# Altium PCB dieukhien.PcbDoc (part 2 of 3)
Units mil, origin at the board's own origin, x right, y up, seen from the top; angles counter-clockwise.
Board outline 7680 x 3350 mil, 2 copper layers (Top Layer, Bottom Layer); 551 components, 172 nets, 1771 pads, 0 vias.
Unrouted connection lines stored in the file: 181.
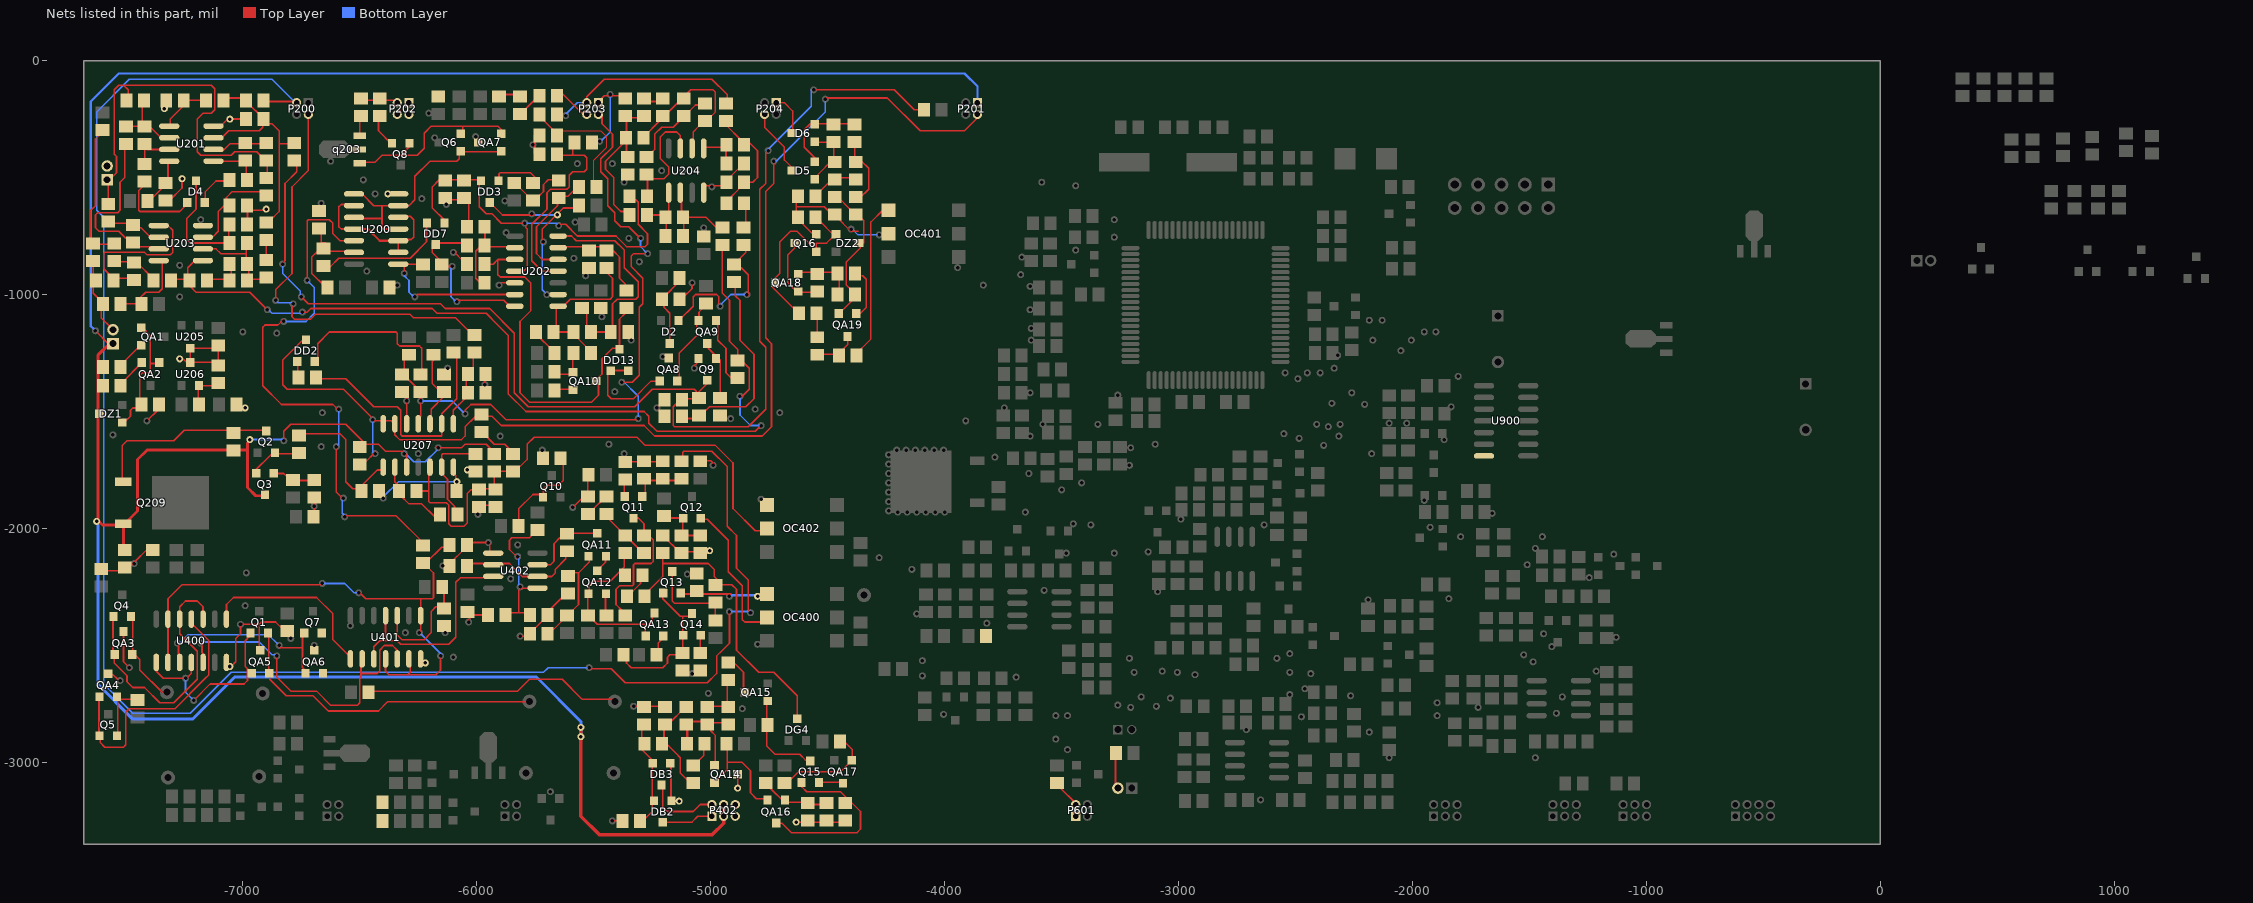
[diagram p2: the nets of this part, all layers, seen from the top]

## Nets (pads, with @x,y where several pads share a name; then routed paths per layer and width w, separated by ;. In a path a pad name is that pad's centre, name@x,y a point inside that pad or via, vN(x,y) a via of type N, cw(c..) or ccw(c..) an arc to the next point about the centre after c; other vN are vias at no path point)
1: C5.1 R15.1 R16.1 R17.2 U203.2 | length 373.3
  Top Layer w7: U203.2@-7135,-805 -7115,-805 -7095,-825 -6985,-825 ; R16.1@-6985,-850 R15.1@-6985,-775 ; R16.1@-6975,-880 -6975,-935 R17.2@-6890,-935
15V: C20.2 C230.1 DZ1.3 P201.1 P402.3 P402.4 pad.0@-5555,-2850 pad.0@-5555,-2890 pad.0@-6970,-1620 pad.0@-7625,-1970 Q3.3 Q209.3 R23.2 R24.2 R28.1 R32.2 R39.2 U207.3 | length 12513.8
  Top Layer w7: -7635,-1155 -7630,-1155 C230.1@-7575,-1210 ; C230.1@-7570,-1215 C230.1@-7560,-1215 ; C230.1@-7570,-1210 C230.1@-7555,-1210 ; -6825,-1615 -6825,-1585 -6795,-1555 -6560,-1555 -6475,-1640 -6435,-1640 -6420,-1640 -6390,-1670 -6315,-1670 -6300,-1685 U207.3@-6300,-1710 ; -6175,-1650 -6170,-1655 -6065,-1655 -6050,-1640 -5960,-1640 R39.2@-5930,-1670
  Top Layer w12: pad.0@-6965,-1620 -6980,-1635 -6980,-1825 -6945,-1860 Q3.3@-6920,-1860
  Top Layer w13: C230.1@-7570,-1210 -7620,-1260 -7620,-1965 -7600,-1985 -7510,-1985 -7450,-1925 -7450,-1705 -7410,-1665 -6985,-1665 ; C20.2@-7510,-2095 Q209.3@-7510,-1980
  Top Layer w15: pad.0@-5555,-2850 -5555,-3230 -5475,-3310 -4995,-3310 -4945,-3260 P402.4@-4945,-3180
  Bottom Layer w7: -6312.5,-1672.5 -6270,-1715 -6220,-1715 -6170,-1665
  Bottom Layer w7.87: pad.0@-6975,-1620 -6825,-1620
  Bottom Layer w10: -7625,-1160 -7650,-1135 -7650,-175 -7530,-55 -3915,-55 -3860,-110 P201.1@-3860,-190
  Bottom Layer w13: pad.0@-7620,-1975 -7620,-2665 -7470,-2815 -7215,-2815 -7035,-2635 -5745,-2635 -5555,-2825 -5555,-2875
380V1: P200.3 R4.2 R126.2 | length 7616.9
  Top Layer w7: R4.2@-6895,-175 P200.3@-6765,-175 ; -5520,-2600 -5425,-2600 -5365,-2660 -5015,-2660 -4975,-2620 -4975,-2545 -4950,-2520 -4920,-2490 -4920,-2360 ; R126.2@-5120,-1705 -5120,-1675 -5115,-1670 -4995,-1670 -4930,-1735 -4930,-1990 -4890,-2030 -4890,-2170 -4840,-2220 -4840,-2350 -4835,-2355
  Bottom Layer w7: P200.3@-6775,-180 -6875,-80 -7485,-80 -7625,-220 -7625,-640 -7595,-670 -7595,-2665 -7470,-2790 -7225,-2790 -7050,-2615 -5715,-2615 -5695,-2595 -5520,-2595
  Bottom Layer w10: -4925,-2355 -4830,-2355
380V2: P200.2 R47.2 | length 1791.2
  Top Layer w7: -6860,-1025 -6860,-980 -6790,-910 -6790,-540 -6720,-470 P200.2@-6720,-230 ; -6790,-1050 -6790,-1095 -6780,-1105 -6710,-1105 -6690,-1085 -6285,-1085 -6270,-1100 -6090,-1100 R47.2@-6022.5,-1167.5
  Bottom Layer w7: -6860,-1025 -6850,-1035 -6785,-1035
G_15VTD: C16.2 DD2.3 P201.2 R32.1 U207.13 U207.14 | length 4974.1
  Top Layer w7: DD2.3@-6740,-1190 -6830,-1280 -6830,-1385 -6810,-1405 -6570,-1405 -6450,-1525 ; R32.1@-6480,-1730 -6480,-1720 -6432.5,-1672.5 ; -6440,-1540 -6365,-1540 U207.13@-6350,-1555 ; U207.13@-6350,-1565 -6350,-1600 -6330,-1620 -6065,-1620 -6050,-1605 -6050,-1565 C16.2@-6005,-1520 ; C16.2@-5985,-1520 -5935,-1520 -5895,-1560 -5330,-1560 -5285,-1560 -5240,-1605 -4780,-1605 -4740,-1565 -4740,-1525 -4740,-1210 -4765,-1185 -4765,-560 -4730,-525 -4730,-435 ; -4505,-160 -4245,-160 -4105,-300 -3915,-300 -3865,-250 P201.2@-3865,-240
  Bottom Layer w7: -6445,-1675 -6445,-1535 ; -4725,-430 -4720,-430 -4510,-220 -4510,-165
GND: C98.1 C118.1 C119.2 C636.2 P601.1 P601.2 pad.0@-6220,-2575 pad.0@-6380,-570 pad.0@-7055,-2590 U401.7 U900.7 | length 346.1
  Top Layer w7: C118.1@-3515,-3105 C118.1@-3515,-3085 ; C118.1@-3510,-3085 -3510,-3105 P601.2@-3440,-3175 ; C636.2@-3270,-3110 C119.2@-3270,-2950
  Bottom Layer w6.5: P601.1@-3445,-3220 P601.2@-3445,-3180
  Bottom Layer w10: P601.1@-3440,-3230 P601.1@-3435,-3225
I_FPC: P203.3 R72.2 R94.2 | length 808.7
  Top Layer w7: P203.3@-5530,-175 -5530,-155 -5455,-80 -4995,-80 -4930,-145 R94.2@-4930,-165
  Bottom Layer w7: -5620,-230 -5570,-180 P203.3@-5530,-180
N: C2.1 C3.2 C5.2 C6.2 C7.1 C8.1 C10.2 C11.1 C12.1 C13.1 C14.1 C15.1 C17.1 C18.1 C19.2 C20.1 C21.2 C23.1 C27.1 C28.2 C29.1 C30.1 C31.2 C32.2 C33.2 C34.1 C35.1 C36.1 C37.1 C38.2 C40.1 C43.1 C46.1 C47.2 C48.2 C49.1 C50.2 C51.1 C53.1 C54.2 C55.1 C56.2 C57.2 C59.2 C60.1 C61.1 C62.2 C63.2 C65.1 C133.1 C230.2 C236.2 DB2.1 DB3.1 OC402.4 P202.1 P202.2 P203.1 P402.5 P402.6 pad.0@-4635,-3255 pad.0@-4885,-3110 pad.0@-5005,-2095 pad.0@-5135,-3165 pad.0@-6040,-1750 pad.0@-6900,-635 pad.0@-6990,-1485 pad.0@-7055,-250 pad.0@-7260,-505 pad.0@-7270,-1275 pad.0@-7335,-205 Q9.2 q203.2 QA3.3 QA4.3 QA5.3 QA6.3 QA7.3 QA8.3 QA14.3 R2.1 R16.2 R22.1 R26.1 R27.2 R31.1 R37.1 R38.1 R41.2 R42.2 R73.1 R83.2 R85.2 R90.1 R105.1 R112.2 R114.1 R118.1 R119.2 R122.2 R124.2 R125.2 R128.1 R131.2 R136.1 R137.2 R140.2 R155.1 R156.1 R280.2 U200.7 U201.4 U202.12 U203.4 U204.4 U205.3 U206.3 U207.12 U400.7 U402.1 | length 5447.5
  Top Layer w7: R22.1@-7640,-860 -7640,-995 -7605,-1030 -7605,-1100 C230.2@-7565,-1140 ; C21.2@-7590,-2180 -7500,-2180 -7460,-2140 -7410,-2090 C19.2@-7385,-2090 ; QA4.3@-7565,-2625 -7555,-2625 -7535,-2645 ; QA3.3@-7510,-2440 -7510,-2570 -7480,-2600 ; -7410,-1540 -7360,-1490 R26.1@-7345,-1490 ; C2.1@-7310,-600 -7310,-595 -7260,-545 -7260,-510 pad.0@-7255,-505 ; pad.0@-7270,-1270 -7260,-1270 U206.3@-7235,-1295 ; U206.3@-7225,-1280 U205.3@-7225,-1235 ; U205.3@-7220,-1230 -7100,-1230 -7105,-1235 R27.2@-7105,-1295 ; U206.3@-7215,-1290 -7115,-1290 R27.2@-7110,-1295 ; C6.2@-7140,-935 C5.2@-7065,-935 ; U201.4@-7100,-280 -7095,-280 -7065,-250 C3.2@-7005,-250 ; -7050,-2590 -7030,-2570 -7030,-2470 -7010,-2450 -7010,-2420 ; C5.2@-7050,-920 R16.2@-7050,-865 ; -7005,-2410 -6930,-2410 ; C8.1@-6980,-705 C7.1@-6980,-615 ; C7.1@-6965,-640 pad.0@-6905,-640 ; QA5.3@-6925,-2510 -6930,-2505 -6930,-2410 ; C23.1@-6830,-2435 -6830,-2430 -6860,-2400 -6920,-2400 -6930,-2410 ; C12.1@-6695,-1945 R31.1@-6695,-1880 ; U207.12@-6300,-1525 C18.1@-6300,-1425 ; R90.1@-6135,-595 -6045,-595 -6035,-605 R85.2@-6035,-705 ; C28.2@-6115,-2145 -6110,-2145 C29.1@-6055,-2090 ; -6090,-815 -6090,-825 C38.2@-6065,-850 ; -6035,-2405 -6035,-2390 -6015,-2370 C31.2@-5960,-2370 ; C29.1@-6035,-2060 -5950,-2060 -5945,-2065 U402.1@-5945,-2100 ; R38.1@-5990,-1900 -5910,-1900 C13.1@-5905,-1905 ; C17.1@-5970,-1425 -5965,-1420 R41.2@-5965,-1350 ; -5895,-950 U202.12@-5855,-950 ; -5820,-2460 R119.2@-5795,-2460 ; R119.2@-5755,-2430 R118.1@-5710,-2385 ; C36.1@-5755,-395 C35.1@-5755,-320 ; R118.1@-5690,-2350 -5630,-2290 C53.1@-5630,-2270 ; C53.1@-5615,-2275 C53.1@-5610,-2275 ; -5595,-1910 -5590,-1910 -5525,-1845 C54.2@-5525,-1780 ; R122.2@-5550,-1865 R122.2@-5530,-1865 ; P203.1@-5480,-180 -5480,-175 -5455,-150 R83.2@-5370,-150 ; -5425,-3245 -5420,-3250 R280.2@-5390,-3250 ; R124.2@-5355,-1715 -5215,-1715 R125.2@-5210,-1720 ; -5340,-2760 -5315,-2760 ; R137.2@-5270,-2765 -5265,-2760 C62.2@-5190,-2760 ; C59.2@-5200,-2050 -5185,-2050 R128.1@-5150,-2085 ; DB2.1@-5170,-3160 DB3.1@-5170,-3005 ; DB2.1@-5160,-3165 pad.0@-5130,-3165 ; R128.1@-5120,-2100 -5040,-2100 -5035,-2095 pad.0@-4995,-2095 ; C49.1@-5120,-1010 -5115,-1010 -5080,-975 -5080,-945 ; -5095,-2195 R131.2@-5045,-2195 ; -5070,-1315 -5070,-1305 -5060,-1295 Q9.2@-5060,-1280 ; C57.2@-5035,-1710 -5000,-1710 -4985,-1725 ; U204.4@-5035,-545 -5025,-535 C47.2@-4950,-535 ; R140.2@-5005,-2760 C63.2@-4950,-2760 ; C63.2@-4930,-2755 C61.1@-4930,-2650 ; C47.2@-4920,-500 C46.1@-4860,-440 ; pad.0@-4885,-3105 QA14.3@-4885,-3050 ; pad.0@-4635,-3260 -4630,-3255 R156.1@-4425,-3255
  Bottom Layer w7: -5470,-345 -5430,-305 -5430,-145
NetC1_1: C1.1 R1.2 R5.2 U201.6 | length 222.8
  Top Layer w7: R5.2@-7495,-280 -7440,-280 -7430,-270 R1.2@-7430,-185 ; C1.1@-7395,-280 -7395,-285 U201.6@-7350,-330
NetC1_2: C1.2 R7.1 U201.7 | length 149.1
  Top Layer w7: R7.1@-7425,-440 -7420,-435 C1.2@-7420,-370 ; C1.2@-7410,-380 -7340,-380 U201.7@-7335,-375
NetC4_1: C4.1 R14.1 U201.1 | length 174.1
  Top Layer w7: U201.1@-7110,-430 -7005,-430 C4.1@-6995,-440 ; R14.1@-6985,-500 C4.1@-6985,-445
NetC4_2: C4.2 R11.2 U201.2 | length 202.4
  Top Layer w7: U201.2@-7095,-385 -7085,-385 -7055,-355 R11.2@-6905,-355
NetC8_2: C8.2 D4.3 R15.2 | length 529.9
  Top Layer w7: D4.3@-7195,-515 -7200,-520 -7200,-635 -7240,-675 -7240,-765 -7225,-780 R15.2@-7075,-780 ; R15.2@-7060,-780 C8.2@-7060,-690
NetC9_1: C9.1 R17.1 | length 75
  Top Layer w7: R17.1@-6900,-845 C9.1@-6900,-770
NetC11_2: C11.2 R19.2 U203.5 | length 610.2
  Top Layer w7: C11.2@-7555,-930 -7595,-890 -7595,-825 -7590,-820 -7420,-820 -7410,-830 -7310,-830 -7300,-820 -7300,-725 U203.5@-7320,-705 ; C11.2@-7535,-930 R19.2@-7475,-930
NetC16_1: C16.1 R40.2 | length 178.1
  Top Layer w7: C16.1@-5990,-1595 -5970,-1595 -5925,-1640 -5880,-1640 R40.2@-5845,-1675
NetC17_2: C17.2 R41.1 R47.1 U207.8 | length 300.2
  Top Layer w7: U207.8@-6100,-1535 -6100,-1495 -6045,-1440 -6045,-1350 -6015,-1320 R47.1@-6015,-1270
NetC22_2: C22.2 Q5.2 QA4.2 | length 227.1
  Top Layer w7: QA4.2@-7535,-2720 -7535,-2870 Q5.2@-7530,-2875 ; QA4.2@-7530,-2730 C22.2@-7460,-2730
NetC24_1: C24.1 Q7.2 QA6.2 | length 1090.9
  Top Layer w7: C24.1@-6455,-2695 -5825,-2695 -5775,-2645 -5635,-2645 -5550,-2730 -5420,-2730
NetC28_1: C28.1 R116.1 U402.2 U402.6 | length 382.6
  Top Layer w7: C28.1@-6030,-2150 U402.2@-5945,-2150 ; U402.2@-5895,-2150 -5860,-2150 -5805,-2205 U402.6@-5770,-2205 ; U402.6@-5710,-2205 -5680,-2205 -5665,-2190 -5665,-2175 -5620,-2130 R116.1@-5620,-2110
NetC30_2: C30.2 R61.2 U401.10 | length 444
  Top Layer w7: U401.10@-6340,-2395 -6340,-2455 -6320,-2475 -6225,-2475 -6195,-2445 -6195,-2355 -6175,-2335 C30.2@-6150,-2335 ; C30.2@-6140,-2335 R61.2@-6140,-2260
NetC31_1: C31.1 R115.1 R118.2 U402.5 | length 628.1
  Top Layer w7: C31.1@-5875,-2360 R118.2@-5770,-2360 ; -5830,-2125 -5830,-2120 -5860,-2090 -5860,-2050 -5850,-2040 -5775,-2040 -5750,-2015 R115.1@-5735,-2015 ; -5820,-2360 -5820,-2265 -5810,-2255 ; -5810,-2260 -5805,-2255 U402.5@-5750,-2255
  Bottom Layer w7: -5820,-2240 -5820,-2115
NetC32_1: C32.1 R66.2 R278.2 U200.13 | length 394.6
  Top Layer w7: C32.1@-6665,-725 -6665,-780 R66.2@-6645,-780 ; R278.2@-6652.5,-962.5 -6705,-910 -6705,-850 -6705,-840 -6680,-815 U200.13@-6540,-815
NetC34_2: C34.2 R80.2 R82.2 U202.6 | length 367.8
  Top Layer w7: U202.6@-5640,-800 -5635,-795 R80.2@-5455,-795 ; R80.2@-5425,-815 -5415,-815 -5390,-840 -5390,-930 -5365,-955 R82.2@-5365,-965
NetC35_2: C35.2 R72.1 R77.1 | length 544.2
  Top Layer w4: C35.2@-5635,-300 -5470,-300 -5445,-325 -5445,-370 -5500,-425 R77.1@-5500,-515
  Top Layer w7: R72.1@-5730,-225 -5730,-240 C35.2@-5655,-315
  Top Layer w10: C35.2@-5655,-310 C35.2@-5645,-310
NetC36_2: C36.2 R73.2 U202.4 | length 877.5
  Top Layer w7: U202.4@-5680,-900 -5720,-900 -5765,-855 -5765,-700 -5700,-635 -5700,-565 -5685,-550 -5615,-550 -5605,-540 -5605,-490 -5590,-475 -5540,-475 -5530,-465 -5530,-415 -5540,-405 -5595,-405 ; C36.2@-5645,-405 -5595,-405 ; R73.2@-5590,-360 -5590,-400 -5595,-405
NetC39_1: C39.1 C43.2 R83.1 R84.2 R96.2 | length 569.2
  Top Layer w7: R96.2@-5370,-645 -5385,-645 -5415,-615 -5415,-500 -5450,-465 -5450,-430 -5370,-350 R84.2@-5370,-335 ; R84.2@-5365,-330 -5360,-325 R83.1@-5360,-235 ; C43.2@-5360,-400 R84.2@-5360,-350 ; R83.1@-5340,-245 -5310,-245 C39.1@-5305,-240
NetC39_2: C39.2 R92.2 | length 57.1
  Top Layer w7: C39.2@-5280,-175 -5230,-175 R92.2@-5225,-170
NetC41_1: C41.1 R84.1 R92.1 R93.2 U204.6 | length 602.7
  Top Layer w7: R84.1@-5295,-335 -5205,-245 R93.2@-5130,-170 ; R93.2@-5115,-160 -5115,-155 -5085,-125 -4990,-125 -4980,-135 -4980,-220 -5010,-250 C41.1@-5010,-255 ; U204.6@-5075,-350 -5075,-305 C41.1@-5050,-280
NetC41_2: C41.2 C42.2 R93.1 | length 330.9
  Top Layer w7: C42.2@-5250,-390 -5240,-380 -5240,-315 -5210,-285 -5160,-285 -5065,-190 C41.2@-5040,-190
NetC42_1: C42.1 R95.1 U204.7 | length 472.3
  Top Layer w7: R95.1@-5270,-580 C42.1@-5270,-495 ; C42.1@-5255,-505 -5200,-505 -5180,-485 -5180,-455 -5215,-420 -5215,-325 -5195,-305 -5145,-305 -5130,-320 U204.7@-5130,-350
NetC44_1: C44.1 R98.1 R107.2 U204.2 | length 318.1
  Top Layer w7: U204.2@-5125,-600 -5125,-640 C44.1@-5105,-660 ; R98.1@-5115,-755 C44.1@-5115,-690 ; C44.1@-5110,-685 -5095,-670 -5020,-670 -4975,-715 R107.2@-4950,-715
NetC44_2: C44.2 R96.1 R98.2 U204.1 | length 175
  Top Layer w7: R96.1@-5270,-660 C44.2@-5205,-660 ; R98.2@-5190,-755 C44.2@-5190,-695 ; C44.2@-5180,-650 U204.1@-5180,-600
NetC45_1: C45.1 R80.1 R100.1 R101.2 U202.1 | length 660.1
  Top Layer w7: R100.1@-5660,-1155 U202.1@-5660,-1045 ; R100.1@-5655,-1160 R101.2@-5585,-1160 ; U202.1@-5630,-1050 -5600,-1020 -5430,-1020 -5420,-1010 -5420,-930 -5457.5,-892.5 -5465,-900 R80.1@-5460,-900 ; R101.2@-5590,-1175 -5580,-1175 -5520,-1235 C45.1@-5510,-1235
NetC45_2: C45.2 QA10.1 R103.1 | length 149.1
  Top Layer w7: R103.1@-5660,-1340 -5600,-1340 -5590,-1330 C45.2@-5590,-1255
NetC46_2: C46.2 R97.2 U204.5 | length 150
  Top Layer w7: U204.5@-5025,-370 -4935,-370 C46.2@-4935,-430
NetC47_1: C47.1 R94.1 R97.1 R106.2 | length 454.6
  Top Layer w7: R94.1@-4935,-255 -4935,-275 -4870,-340 -4845,-340 -4800,-385 -4800,-500 -4820,-520 C47.1@-4845,-520 ; R106.2@-4925,-595 -4875,-545 C47.1@-4860,-545
NetC49_2: C49.2 D2.3 R110.1 | length 278.1
  Top Layer w7: C49.2@-5200,-1035 -5200,-1055 -5175,-1080 D2.3@-5175,-1205 ; C49.2@-5195,-1005 -5140,-950 R110.1@-5120,-950
NetC50_1: C50.1 R109.1 R113.1 | length 888.3
  Top Layer w7: C50.1@-5115,-1530 -5055,-1530 -5005,-1480 -4850,-1480 -4815,-1445 -4815,-1255 -4875,-1195 -4875,-1025 -4895,-1005 -4895,-955 R109.1@-4925,-955
NetC51_2: C51.2 Q10.1 R63.1 | length 419.4
  Top Layer w7: R63.1@-5820,-2005 -5820,-1915 -5760,-1855 Q10.1@-5725,-1855 ; Q10.1@-5715,-1860 -5715,-1830 -5700,-1815 -5650,-1815 -5630,-1795 C51.2@-5630,-1715
NetC52_2: C52.2 QA12.1 QA13.1 QA13.3 R123.1 R127.1 R130.2 | length 673.5
  Top Layer w7: C52.2@-5525,-2365 QA12.1@-5525,-2285 ; QA12.1@-5520,-2280 -5520,-2245 -5500,-2225 -5430,-2225 -5370,-2165 R127.1@-5370,-2120 ; C52.2@-5500,-2395 -5485,-2410 -5260,-2410 -5250,-2400 QA13.3@-5250,-2365 ; QA13.1@-5280,-2445 -5280,-2410
NetC53_2: C53.2 QA11.1 R117.2 R119.1 | length 433.3
  Top Layer w7: R119.1@-5695,-2445 -5685,-2445 -5565,-2325 -5565,-2190 ; C53.2@-5595,-2190 -5565,-2190 ; QA11.1@-5520,-2120 -5520,-2145 -5565,-2190
NetC55_2: C55.2 Q12.1 R128.2 R279.1 | length 238.3
  Top Layer w7: R279.1@-5185,-1955 -5110,-1955 -5120,-1965 -5120,-2040 -5110,-2030 C55.2@-5050,-2030
NetC56_1: C56.1 Q11.1 R125.1 R126.1 | length 185
  Top Layer w7: Q11.1@-5280,-1855 C56.1@-5280,-1800 ; C56.1@-5280,-1795 R126.1@-5150,-1795
NetC58_1: C58.1 R127.2 | length 193.8
  Top Layer w7: -5440,-1945 -5440,-1955 C58.1@-5310,-2085
NetC58_2: C58.2 Q11.3 R121.2 | length 586.8
  Top Layer w7: R121.2@-5380,-2350 -5405,-2325 -5405,-2260 -5390,-2245 -5335,-2245 -5330,-2240 -5330,-2155 -5325,-2150 -5255,-2150 -5245,-2140 -5245,-2050 -5285,-2010 -5285,-1980 -5310,-1955 Q11.3@-5325,-1955
NetC59_1: C59.1 DG4.3 R129.1 R132.2 | length 1273.8
  Top Layer w7: R129.1@-5270,-2275 -5270,-2270 -5205,-2205 C59.1@-5205,-2110 ; -5205,-2150 -5010,-2150 -4985,-2175 -4985,-2205 R132.2@-4955,-2235 ; R132.2@-4965,-2240 -4910,-2240 -4890,-2260 -4890,-2520 -4795,-2615 -4730,-2615 -4630,-2715 DG4.3@-4630,-2810
NetC60_2: C60.2 Q13.1 Q14.1 Q14.3 R134.1 | length 591.8
  Top Layer w7: R134.1@-5360,-2565 -5360,-2575 -5340,-2595 -5205,-2595 -5185,-2575 -5185,-2550 -5175,-2540 C60.2@-5140,-2540 ; Q13.1@-5205,-2270 -5205,-2300 -5130,-2375 Q14.3@-5085,-2375 ; C60.2@-5120,-2520 Q14.1@-5120,-2465 ; Q14.1@-5120,-2455 -5120,-2375
NetC61_2: C61.2 QA15.3 | length 168.6
  Top Layer w7: C61.2@-4920,-2570 -4905,-2570 -4860,-2615 QA15.3@-4860,-2705
NetC62_1: C62.1 C64.1 R138.1 R139.2 | length 395.4
  Top Layer w7: C62.1@-5200,-2845 -5200,-2910 -5150,-2960 -5130,-2980 -5130,-3045 C64.1@-5100,-3075 ; C62.1@-5180,-2845 -5180,-2835 -5110,-2765 R139.2@-5110,-2750
NetC63_1: C63.1 QA14.1 R139.1 R140.1 R141.2 | length 373.3
  Top Layer w7: R139.1@-5090,-2825 R140.1@-5015,-2825 ; R140.1@-5000,-2850 -5000,-2865 -4980,-2885 QA14.1@-4980,-3010 ; R140.1@-4990,-2830 C63.1@-4920,-2830
  Top Layer w10: R141.2@-5100,-2910 R139.1@-5100,-2850
NetC64_2: C64.2 R141.1 | length 97.4
  Top Layer w7: C64.2@-5060,-3000 -5030,-2970 R141.1@-5030,-2915
NetC65_2: C65.2 QA16.1 R144.1 R155.2 | length 254.9
  Top Layer w7: R144.1@-4745,-3110 -4685,-3170 C65.2@-4595,-3170 ; C65.2@-4590,-3180 R155.2@-4510,-3180
NetC66_1: C66.1 QA17.1 R145.1 | length 392.6
  Top Layer w7: R145.1@-4665,-3075 -4660,-3075 -4625,-3040 -4445,-3040 -4395,-2990 -4395,-2945 C66.1@-4425,-2915
NetC67_1: C67.1 D5.1 D6.1 R150.2 | length 251.1
  Top Layer w6.5: D5.1@-4550,-495 -4475,-420 -4475,-350 D6.1@-4550,-350
NetC67_2: C67.2 D5.2 D6.2 R151.2 | length 359
  Top Layer w6.5: -4575,-270 -4600,-295 -4600,-370 -4555,-415 D5.2@-4555,-430 ; D6.2@-4555,-270 R151.2@-4385,-270
NetC68_1: C68.1 R146.1 R150.1 | length 185.7
  Top Layer w6.5: R146.1@-4545,-585 -4545,-570 -4495,-520 R150.1@-4490,-520 ; R150.1@-4470,-500 C68.1@-4375,-500
NetC68_2: C68.2 R149.2 R151.1 | length 289
  Top Layer w6.5: C68.2@-4385,-425 R151.1@-4385,-345 ; C68.2@-4375,-430 -4355,-430 -4325,-460 -4325,-550 R149.2@-4365,-590
NetC69_1: C69.1 OC401.2 Q16.2 R146.2 R147.2 | length 607.8
  Top Layer w6.5: R147.2@-4640,-660 -4635,-655 R146.2@-4635,-590 ; -4635,-625 -4515,-625 -4475,-665 -4465,-665 -4400,-730 -4370,-730 ; R147.2@-4625,-680 -4565,-740 Q16.2@-4550,-740
  Bottom Layer w6.5: -4400,-715 -4370,-745 -4285,-745
NetC69_2: C69.2 DZ2.3 QA19.2 R149.1 R153.1 | length 597.7
  Top Layer w6.5: C69.2@-4465,-575 -4395,-645 -4385,-645 -4345,-685 -4345,-780 ; QA19.2@-4440,-1070 -4375,-1005 R153.1@-4375,-1000 ; R153.1@-4395,-985 -4420,-960 -4420,-860 -4360,-800 DZ2.3@-4360,-780
NetC70_1: C70.1 OC401.1 | length 674.7
  Top Layer w6.5: C70.1@-4390,-1260 -4385,-1260 -4315,-1190 -4315,-690 OC401.1@-4265,-640
NetC70_2: C70.2 QA19.3 R158.1 | length 186.6
  Top Layer w6.5: R158.1@-4550,-1255 -4455,-1255 -4415,-1215 QA19.3@-4415,-1180
NetC236_1: C236.1 R1.1 R9.2 R11.1 R13.2 | length 1717.8
  Top Layer w7: C236.1@-7580,-515 -7575,-520 R9.2@-7575,-605 ; C236.1@-7580,-510 -7570,-510 -7540,-480 -7540,-410 -7550,-400 -7550,-125 -7530,-105 -7510,-105 ; R1.1@-7490,-155 -7490,-125 -7510,-105 ; R11.1@-6910,-440 -6910,-420 -6940,-390 -7035,-390 -7050,-405 -7180,-405 -7195,-390 -7195,-250 -7170,-225 -7135,-225 -7120,-210 -7120,-120 -7135,-105 -7510,-105 ; R13.2@-6895,-500 R11.1@-6895,-440
NetD2_1: D2.1 R108.1 R109.2 | length 693.2
  Top Layer w7: D2.1@-5130,-1115 -5130,-1105 -5075,-1050 -5075,-1010 -5065,-1000 -4975,-1000 -4965,-1010 -4965,-1040 ; R109.2@-4920,-890 -4850,-820 R108.1@-4850,-800 ; R109.2@-4900,-885 -4870,-885 -4840,-915 -4840,-1005
  Bottom Layer w7: -4965,-1050 -4915,-1000 -4850,-1000
NetD4_1: D4.1 R7.2 | length 346.9
  Top Layer w7: R7.2@-7415,-525 -7445,-555 -7445,-640 -7440,-645 -7270,-645 D4.1@-7240,-615
NetD4_2: D4.2 R14.2 | length 168.6
  Top Layer w7: D4.2@-7160,-605 -7160,-560 -7115,-515 R14.2@-7055,-515
NetD5_3: D5.3 P204.4 | length 272.6
  Top Layer w6.5: P204.4@-4770,-230 -4770,-285 -4755,-300 -4685,-370 -4685,-425 D5.3@-4655,-455
NetD6_3: D6.3 P204.1 | length 174.5
  Top Layer w6.5: P204.1@-4720,-180 -4685,-180 -4650,-215 D6.3@-4650,-305
NetDB2_2: DB2.2 DB3.2 R137.1 R138.2 R280.1 | length 417.3
  Top Layer w7: R137.1@-5295,-2845 -5295,-2945 DB3.2@-5245,-2995 ; R280.1@-5290,-3250 -5250,-3210 DB2.2@-5250,-3170 ; DB2.2@-5250,-3160 DB3.2@-5250,-3010
NetDD2_1: DD2.1 R48.2 | length 45
  Top Layer w7: R48.2@-6765,-1345 DD2.1@-6765,-1300
NetDD2_2: DD2.2 R43.2 | length 750.2
  Top Layer w7: R43.2@-6225,-1325 -6235,-1315 -6235,-1230 -6245,-1220 -6330,-1220 -6340,-1210 -6340,-1165 -6345,-1160 -6630,-1160 -6680,-1210 ; -6680,-1210 -6680,-1275 -6680,-1210
NetDD3_1: DD3.1 R75.2 | length 197.4
  Top Layer w7: DD3.1@-5905,-510 -5905,-485 -5900,-480 -5770,-480 R75.2@-5745,-505
NetDD3_3: DD3.3 pad.0@-5655,-660 R78.2 U202.2 | length 769.2
  Top Layer w7: DD3.3@-5940,-615 -5935,-615 -5890,-660 -5755,-660 ; -5720,-780 -5720,-720 -5630,-630 R78.2@-5570,-630
  Bottom Layer w7: -5750,-660 pad.0@-5655,-660 ; -5720,-785 -5720,-980 -5700,-1000
NetDD7_2: DD7.2 R66.1 | length 563.5
  Top Layer w7: R66.1@-6655,-880 -6625,-880 -6590,-845 -6285,-845 -6215,-775 DD7.2@-6215,-695
NetDD7_3: DD7.3 R86.2 R88.2 U202.14 | length 712.6
  Top Layer w7: DD7.3@-6190,-780 -6190,-820 -6130,-880 -6100,-880 ; DD7.3@-6180,-780 R86.2@-6040,-780 ; -6085,-1025 -5885,-1025 -5855,-1055 U202.14@-5845,-1055
  Bottom Layer w7: -6110,-880 -6110,-1010 -6085,-1035
NetDD13_1: DD13.1 DD13.2 QA8.1 | length 407.3
  Top Layer w7: DD13.1@-5440,-1335 -5440,-1430 -5425,-1445 -5330,-1445 -5255,-1370 QA8.1@-5225,-1370 ; DD13.1@-5425,-1325 DD13.2@-5365,-1325
NetDZ1_1: DZ1.1 QA1.1 QA2.1 R26.2 | length 513.1
  Top Layer w7: DZ1.1@-7500,-1540 -7480,-1520 -7480,-1495 -7470,-1485 R26.2@-7445,-1485 ; R26.2@-7440,-1465 -7440,-1345 -7430,-1335 -7400,-1335 -7395,-1330 -7395,-1180 ; QA1.1@-7430,-1140 -7395,-1175 -7395,-1185 ; -7395,-1295 QA2.1@-7355,-1295
NetDZ2_1: DZ2.1 Q16.1 QA18.3 R147.1 R157.2 | length 770.5
  Top Layer w6.5: R157.2@-4630,-1075 -4735,-970 -4735,-940 -4705,-910 -4705,-775 -4660,-730 -4630,-730 -4580,-780 -4505,-780 -4480,-755 DZ2.1@-4470,-755 ; Q16.1@-4550,-820 -4550,-780 ; R147.1@-4535,-680 -4535,-685 DZ2.1@-4475,-745
NetOC400_4: OC400.4 pad.0@-4800,-2290 Q13.2 R131.1 | length 305
  Top Layer w7: Q13.2@-5110,-2280 -4915,-2280
  Bottom Layer w10: -4920,-2285 pad.0@-4810,-2285
NetOC400_5: OC400.5 Q12.2 | length 617.5
  Top Layer w7: Q12.2@-5040,-1960 -5015,-1960 -4925,-2050 -4925,-2185 -4865,-2245 -4865,-2390 -4855,-2400 -4790,-2400 OC400.5@-4775,-2385
NetP202_3: P202.3 P202.4 R64.2 R65.2 | length 189.1
  Top Layer w7: R65.2@-6480,-170 -6355,-170 P202.3@-6345,-180 ; P202.4@-6330,-225 P202.3@-6330,-175
NetQ1_1: Q1.1 QA5.1 U400.1 U400.4 | length 775.8
  Top Layer w7: U400.1@-7370,-2605 -7370,-2610 -7340,-2640 -7240,-2640 -7220,-2620 U400.4@-7220,-2600 ; -7210,-2735 -7140,-2665 -6995,-2665 -6980,-2650 -6980,-2600 -6990,-2590 -6990,-2480 -6970,-2460 Q1.1@-6970,-2445
  Bottom Layer w7: -7245,-2645 -7245,-2700 -7215,-2730
NetQ1_2: Q1.2 QA5.2 | length 1357.5
  Top Layer w7: QA5.2@-6890,-2615 Q1.2@-6890,-2455 ; QA5.2@-6885,-2630 -6885,-2645 -6815,-2715 -6700,-2715 -6635,-2780 -6420,-2780 -6380,-2740 -5775,-2740
NetQ2_2: Q2.2 Q3.2 R30.1 | length 213.1
  Top Layer w7: Q3.2@-6955,-1760 Q2.2@-6875,-1680 ; Q2.2@-6860,-1680 R30.1@-6760,-1680
NetQ2_3: Q2.3 Q209.1 R28.2 | length 781.9
  Top Layer w7: Q209.1@-7515,-1790 -7515,-1645 -7495,-1625 -7295,-1625 -7250,-1580 Q2.3@-6905,-1580
NetQ3_1: Q3.1 R29.2 R31.2 | length 177.4
  Top Layer w7: Q3.1@-6870,-1765 -6825,-1765 -6795,-1795 R31.2@-6705,-1795
NetQ4_1: Q4.1 QA3.1 U400.10 U400.12 | length 1093.3
  Top Layer w7: QA3.1@-7550,-2555 -7550,-2575 -7495,-2630 -7495,-2655 -7470,-2680 -7420,-2680 -7355,-2745 -7295,-2745 -7195,-2645 -7195,-2525 -7270,-2450 U400.12@-7270,-2415 ; U400.12@-7270,-2360 -7270,-2335 -7245,-2310 -7195,-2310 -7170,-2335 U400.10@-7170,-2370
  Top Layer w7.87: QA3.1@-7555,-2530 Q4.1@-7555,-2380
NetQ4_2: Q4.2 QA3.2 | length 391.8
  Top Layer w7: Q4.2@-7470,-2380 -7470,-2530 -7440,-2560 -7440,-2605 -7345,-2700 -7325,-2700
NetQ5_1: Q5.1 QA4.1 U400.11 | length 1111.8
  Top Layer w7: QA4.1@-7620,-2710 QA4.1@-7610,-2720 ; Q5.1@-7615,-2875 QA4.1@-7615,-2725 ; Q5.1@-7610,-2900 -7610,-2915 -7590,-2935 -7510,-2935 -7500,-2925 -7500,-2785 -7485,-2770 -7415,-2770 -7290,-2770 -7165,-2645 -7145,-2625 -7145,-2480 -7215,-2410 U400.11@-7220,-2410
NetQ6_1: Q6.1 QA7.1 U200.4 U200.6 U200.8 U200.10 | length 978.3
  Top Layer w7: U200.10@-6505,-675 -6405,-675 ; U200.8@-6505,-570 -6490,-570 -6440,-620 U200.6@-6370,-620 ; -6405,-620 -6405,-710 -6395,-720 -6370,-720 U200.4@-6365,-715 ; U200.6@-6330,-620 -6290,-620 -6265,-595 -6265,-495 -6200,-430 -6085,-430 -6075,-420 Q6.1@-6075,-390 ; Q6.1@-6055,-390 QA7.1@-5895,-390
NetQ6_2: Q6.2 Q8.1 q203.1 QA7.2 | length 807.1
  Top Layer w7: q203.1@-6480,-435 -6435,-435 -6405,-405 -6325,-405 ; Q8.1@-6280,-360 -6325,-405 ; -6085,-280 -5910,-280 QA7.2@-5895,-295 ; Q6.2@-6060,-305 -6060,-280 -6195,-280 -6225,-310 -6225,-375 -6255,-405 -6325,-405
NetQ7_1: Q7.1 QA6.1 U400.3 | length 787.3
  Top Layer w7: -6850,-2500 -6840,-2510 -6745,-2510 ; Q7.1@-6745,-2460 -6745,-2595 -6740,-2600 QA6.1@-6740,-2630
  Top Layer w7.87: U400.3@-7275,-2540 -7275,-2495
  Bottom Layer w7: -7280,-2490 -7270,-2490 -7235,-2455 -6890,-2455 -6850,-2495
NetQ8_2: Q8.2 R64.1 | length 132.8
  Top Layer w7: R64.1@-6420,-245 -6420,-300 Q8.2@-6365,-355
NetQ9_1: Q9.1 QA9.3 R114.2 | length 225.7
  Top Layer w7: QA9.3@-5010,-1225 -5010,-1230 -4970,-1270 -4960,-1280 R114.2@-4960,-1430
NetQ9_3: Q9.3 R12.1 R112.1 R113.2 R277.2 | length 5362.3
  Top Layer w7: -6835,-870 -6820,-855 -6820,-525 -6770,-475 R12.1@-6770,-435 ; -6752.5,-1007.5 -6720,-1040 -6155,-1040 -6135,-1060 -5945,-1060 -5840,-1165 -5840,-1420 -5780,-1480 -5325,-1480 -5250,-1405 -5070,-1405 -5050,-1425 R113.2@-5050,-1430 ; R112.1@-5132.5,-1452.5 -5160,-1480 -5160,-1560 -5155,-1565 -4840,-1565 -4765,-1490 -4765,-1225 -4790,-1200 -4790,-550 -4765,-525 -4765,-390 ; R112.1@-5120,-1445 R113.2@-5075,-1445 ; R113.2@-5065,-1430 -5015,-1380 Q9.3@-5015,-1370 ; -4555,-125 -4215,-125 -4130,-210 R277.2@-4080,-210
  Bottom Layer w7: -6830,-875 -6830,-910 -6755,-985 -6755,-1010 ; -4760,-385 -4570,-195 -4570,-125
NetQ11_2: Q11.2 R124.1 | length 70
  Top Layer w7: Q11.2@-5370,-1855 R124.1@-5370,-1785
NetQ13_3: Q13.3 R132.1 R133.2 | length 385.4
  Top Layer w7: Q13.3@-5165,-2200 -5165,-2310 -5155,-2320 -4970,-2320 R132.1@-4955,-2335 ; R133.2@-4980,-2385 R132.1@-4980,-2330
NetQ14_2: Q14.2 R136.2 | length 80
  Top Layer w7: R136.2@-5045,-2535 Q14.2@-5045,-2455
NetQ15_1: Q15.1 QA16.3 R156.2 | length 741.3
  Top Layer w7: QA16.3@-4710,-3260 -4695,-3260 -4655,-3300 -4375,-3300 -4360,-3285 -4360,-3210 -4445,-3125 -4590,-3125 -4610,-3105
NetQ15_2: Q15.2 QA17.3 | length 100
  Top Layer w7: Q15.2@-4525,-3085 QA17.3@-4425,-3085
NetQ15_3: Q15.3 QA15.1 R143.1 | length 394.9
  Top Layer w7: QA15.1@-4760,-2740 -4760,-2930 -4725,-2965 -4620,-2965 -4595,-2990 Q15.3@-4580,-2990
NetQ16_3: Q16.3 QA18.1 R148.1 | length 304
  Top Layer w6.5: Q16.3@-4640,-780 -4640,-800 -4670,-830 -4670,-950 QA18.1@-4630,-990 ; QA18.1@-4625,-990 R148.1@-4560,-990
Netq203_3: q203.3 R65.1 | length 80
  Top Layer w7: q203.3@-6500,-315 R65.1@-6500,-235
NetQA1_2: QA1.2 R23.1 | length 111.1
  Top Layer w7: R23.1@-7510,-1290 -7435,-1215 QA1.2@-7435,-1210
NetQA2_2: QA2.2 R24.1 | length 106.9
  Top Layer w7: R24.1@-7505,-1380 -7505,-1365 QA2.2@-7440,-1300
NetQA8_2: QA8.2 QA9.2 R111.1 | length 348.5
  Top Layer w7: QA8.2@-5135,-1360 -5135,-1250 -5060,-1175 QA9.2@-5060,-1120 ; QA9.2@-5050,-1110 -5050,-1075 R111.1@-5020,-1045
NetQA9_1: QA9.1 R91.1 | length 262.8
  Top Layer w7: QA9.1@-4970,-1115 -4970,-1195 -4935,-1230 -4935,-1335 -4915,-1355
NetQA10_2: QA10.2 R104.1 | length 62.1
  Top Layer w7: R104.1@-5650,-1405 -5595,-1405 QA10.2@-5590,-1410
NetQA11_2: QA11.2 QA12.3 | length 64.5
  Top Layer w7: QA12.3@-5485,-2180 -5450,-2145 QA11.2@-5450,-2130
NetQA11_3: QA11.3 R116.2 U402.7 | length 276.6
  Top Layer w7: U402.7@-5710,-2155 -5685,-2155 -5670,-2140 -5670,-2065 -5645,-2040 R116.2@-5640,-2040 ; R116.2@-5610,-2020 QA11.3@-5495,-2020
NetQA12_2: QA12.2 R120.2 | length 74.1
  Top Layer w7: R120.2@-5460,-2365 -5450,-2355 QA12.2@-5450,-2295
NetQA13_2: QA13.2 R135.1 | length 75.4
  Top Layer w7: R135.1@-5225,-2530 -5225,-2490 QA13.2@-5200,-2465
NetQA14_2: QA14.2 QA16.2 R142.2 | length 463.5
  Top Layer w7: QA14.2@-4975,-3075 -4930,-3030 R142.2@-4930,-2920 ; -4930,-3000 -4865,-3000 -4830,-3035 -4830,-3130 -4805,-3155 QA16.2@-4760,-3155
NetQA18_2: QA18.2 R148.2 R152.2 R153.2 | length 254.1
  Top Layer w6.5: QA18.2@-4620,-910 -4615,-905 -4455,-905 -4450,-910 R153.2@-4450,-990
NetQA19_1: QA19.1 R152.1 | length 196.6
  Top Layer w6.5: QA19.1@-4375,-1080 -4360,-1080 -4335,-1055 -4335,-935 -4350,-920 -4355,-920
NetR2_2: R2.2 R3.1 U201.5 | length 201.9
  Top Layer w7: U201.5@-7310,-275 -7310,-250 -7250,-190 R2.2@-7250,-175 ; R2.2@-7235,-175 -7230,-170 R3.1@-7160,-170
NetR5_1: R5.1 R10.1 U203.7 | length 764.7
  Top Layer w7: R5.1@-7505,-355 -7505,-500 -7525,-520 -7525,-640 -7535,-650 -7620,-650 -7630,-660 -7630,-715 -7615,-730 -7530,-730 -7465,-795 U203.7@-7360,-795
NetR6_1: R6.1 R21.2 R22.2 | length 584
  Top Layer w7: R6.1@-7605,-310 -7630,-335 -7630,-620 -7650,-640 -7650,-760 -7655,-760 -7630,-785 R21.2@-7555,-785
NetR18_2: R18.2 R19.1 R21.1 | length 174
  Top Layer w7: R21.1@-7540,-855 -7535,-860 R19.1@-7470,-860 ; R19.1@-7450,-865 -7385,-930 R18.2@-7385,-940
NetR25_1: R25.1 R27.1 U206.2 | length 159.1
  Top Layer w7: R25.1@-7190,-1475 -7190,-1400 -7180,-1390 R27.1@-7110,-1390
NetR30_2: R30.2 R33.2 U207.1 | length 617.6
  Top Layer w7: R30.2@-6775,-1595 -6585,-1595 -6560,-1620 -6560,-1800 -6530,-1830 -6485,-1830 -6485,-1810 -6425,-1750 U207.1@-6405,-1750
NetR33_1: pad.0@-6085,-1800 R33.1 R35.1 U207.7 | length 408.1
  Top Layer w7: U207.7@-6105,-1760 -6090,-1775 R35.1@-6090,-1820
  Bottom Layer w7: -6400,-1865 -6335,-1800 pad.0@-6085,-1800
NetR34_2: R34.2 R36.2 U207.2 | length 272.6
  Top Layer w7: U207.2@-6350,-1755 -6350,-1800 R34.2@-6325,-1825 ; R34.2@-6325,-1860 -6290,-1895 -6235,-1895 -6180,-1950 R36.2@-6180,-1960
NetR36_1: R36.1 R37.2 U207.6 | length 354.9
  Top Layer w7: U207.6@-6150,-1765 -6125,-1790 -6125,-1875 -6095,-1905 R36.1@-6095,-1925 ; U207.6@-6150,-1710 -6150,-1685 -6145,-1680 -6025,-1680 R37.2@-6005,-1680
NetR42_1: R42.1 R45.1 U207.10 | length 294.4
  Top Layer w7: U207.10@-6195,-1545 -6195,-1490 -6140,-1435 R42.1@-6140,-1425 ; R45.1@-6185,-1280 -6190,-1285 -6190,-1380 R42.1@-6155,-1415
NetR46_1: R46.1 R48.1 U207.9 | length 1029.9
  Top Layer w7: R48.1@-6675,-1360 -6560,-1360 -6440,-1480 -6340,-1480 -6325,-1495 -6325,-1600 -6320,-1605 -6150,-1605 U207.9@-6150,-1575 ; U207.9@-6150,-1525 -6150,-1510 -6085,-1445 R46.1@-6085,-1240
NetR58_2: R58.2 R59.1
NetR62_2: R62.2 U200.12 | length 2340.7
  Top Layer w7: -6830,-1110 -6850,-1130 -6905,-1130 -6915,-1140 -6915,-1390 -6835,-1470 -6615,-1470 -6595,-1490 ; -6725,-930 -6725,-685 -6720,-680 -6630,-680 -6615,-695 -6615,-740 -6585,-770 U200.12@-6560,-770 ; -6600,-1655 -6600,-1845 -6580,-1865 -6580,-1875 ; -6565,-1945 -6345,-1945 -6230,-2060 R62.2@-6225,-2060
  Bottom Layer w7: -6825,-1115 -6730,-1115 -6695,-1080 -6695,-970 -6725,-940
  Bottom Layer w7.87: -6600,-1650 -6590,-1640 -6590,-1490 ; -6575,-1870 -6575,-1935 -6565,-1945
NetR69_2: R69.2 R70.2 | length 100
  Top Layer w7: R69.2@-5900,-145 R70.2@-5800,-145
NetR70_1: R70.1 R71.1 | length 94.9
  Top Layer w7: R70.1@-5795,-220 -5795,-210 R71.1@-5735,-150
NetR74_2: R74.2 R75.1 R76.2 | length 204.4
  Top Layer w7: R74.2@-5815,-545 R75.1@-5760,-600 ; R75.1@-5735,-580 -5715,-560 -5715,-530 -5695,-510 R76.2@-5655,-510
NetR76_1: R76.1 R77.2 U202.5 | length 447.1
  Top Layer w7: U202.5@-5675,-850 -5720,-850 -5745,-825 -5745,-710 -5655,-620 R76.1@-5655,-605 ; R76.1@-5670,-580 -5610,-580 R77.2@-5575,-545
NetR81_1: R81.1 R101.1 R105.2 U202.7 | length 938.7
  Top Layer w7: U202.7@-5620,-750 -5595,-750 -5575,-770 -5410,-770 -5370,-810 -5370,-885 -5310,-945 -5310,-1010 -5320,-1020 -5400,-1020 -5420,-1040 -5420,-1140 -5430,-1150 R105.2@-5430,-1175 ; R81.1@-5525,-1075 -5530,-1080 -5530,-1135 -5505,-1160 R105.2@-5425,-1160
NetR85_1: R85.1 R86.1 R87.1 U202.9 | length 374
  Top Layer w7: R87.1@-5965,-950 -5985,-950 -6005,-930 -6005,-815 -5965,-775 R85.1@-5965,-720 ; R86.1@-5955,-795 -5870,-795 U202.9@-5860,-805
NetR89_2: R89.2 U200.1 U202.13 | length 638.6
  Top Layer w7: -6310,-900 U200.1@-6310,-875 ; U200.1@-6310,-870 R89.2@-6220,-870 ; -6255,-1000 -5855,-1000 U202.13@-5850,-995
  Bottom Layer w7: -6310,-910 -6310,-920 -6290,-940 -6290,-990 -6270,-1010
NetR100_2: R100.2 R102.1 | length 70.7
  Top Layer w7: R100.2@-5735,-1180 R102.1@-5685,-1230
NetR106_1: R106.1 R108.2 | length 90
  Top Layer w7: R108.2@-4850,-710 R106.1@-4850,-620
NetR122_1: R122.1 R123.2 | length 71.6
  Top Layer w7: R122.1@-5500,-1915 -5460,-1875 R123.2@-5445,-1875
NetR129_2: R129.2 R130.1 | length 81
  Top Layer w7: R129.2@-5342.5,-2267.5 -5332.5,-2267.5 -5300,-2235 R130.1@-5300,-2210
NetR157_1: R157.1 R158.2 | length 117.1
  Top Layer w6.5: R158.2@-4550,-1190 -4545,-1185 R157.1@-4545,-1075
NetU200_2: U200.2 U200.3 U200.5 U200.9 U200.11 | length 608.3
  Top Layer w7: U200.11@-6555,-720 -6580,-720 -6590,-710 -6590,-625 -6580,-615 U200.9@-6530,-615 ; U200.2@-6335,-820 U200.3@-6335,-770 ; U200.5@-6310,-665 -6285,-665 -6270,-680 -6270,-755 -6280,-765 U200.3@-6305,-765
  Top Layer w10: U200.11@-6524.49,-720 -6465,-720 -6415,-770 U200.3@-6335.51,-770
NetU401_3: U401.3 U401.11 U402.3 | length 882.3
  Top Layer w7: U401.3@-6440,-2530 -6440,-2505 -6415,-2480 -6340,-2480 -6325,-2495 -6120,-2495 -6090,-2465 -6090,-2230 -6070,-2210 U402.3@-5955,-2210 ; -6390,-2480 U401.11@-6390,-2380
OC402-5: C13.2 OC402.5 R34.1 R38.2 R39.1 R40.1 U207.5 | length 2212.9
  Top Layer w7: R34.1@-6250,-1840 -6205,-1840 ; U207.5@-6205,-1770 -6205,-1885 -6200,-1890 -6130,-1890 -6120,-1900 -6120,-1980 -6110,-1990 -6055,-1990 -6040,-1975 -6040,-1850 -6025,-1835 -6020,-1835 ; R38.2@-6010,-1820 -6000,-1830 C13.2@-5935,-1830 ; C13.2@-5925,-1825 R39.1@-5925,-1765 ; R39.1@-5910,-1755 R40.1@-5855,-1755 ; R40.1@-5830,-1750 -5785,-1705 -5785,-1640 -5755,-1610 -5315,-1610 -5280,-1645 -4980,-1645 -4905,-1720 -4905,-1915 -4810,-2010 OC402.5@-4760,-2010
P203-2: C18.2 P203.2 R43.1 R44.1 U207.11 | length 2826
  Top Layer w7: R44.1@-6310,-1275 -6310,-1335 -6295,-1360 R43.1@-6250,-1405 ; U207.11@-6255,-1535 -6240,-1520 R43.1@-6240,-1440 ; -6050,-1505 -6050,-1495 -6025,-1470 -5940,-1470 -5875,-1535 -5315,-1535 ; P203.2@-5465,-240 -5465,-270 -5420,-315 -5420,-370 -5470,-420 -5470,-475 -5440,-505 -5440,-620 -5410,-650 -5410,-685 -5385,-710 -5350,-710 -5305,-755 ; -5385,-1375 -5335,-1375 -5305,-1345 -5305,-1055 -5290,-1040 -5290,-930 -5340,-880 -5340,-835 -5330,-825 -5285,-825
  Bottom Layer w7: -5375,-1370 -5310,-1435 -5310,-1525 ; -5300,-760 -5300,-795 -5275,-820
  Bottom Layer w7.87: -6240,-1455 -6105,-1455 -6055,-1505
P402-1: DB2.3 P402.1 | length 220.4
  Top Layer w7: DB2.3@-5205,-3255 -5080,-3255 -5055,-3230 P402.1@-4995,-3230
P402-2: DB3.3 P402.2 | length 307.8
  Top Layer w7: DB3.3@-5210,-3105 -5205,-3110 -5205,-3190 -5185,-3210 -5075,-3210 -5045,-3180 P402.2@-5005,-3180
RELAY_KD: P203.4 R71.2 | length 143.1
  Top Layer w7: R71.2@-5640,-145 -5630,-145 -5550,-225 P203.4@-5530,-225
U201-3: C3.1 C9.2 R3.2 R4.1 R12.2 U201.3 | length 872.1
  Top Layer w7: U201.3@-7090,-330 -7060,-300 -6930,-300 -6915,-285 C3.1@-6915,-270 ; R3.2@-7075,-160 R4.1@-6990,-160 ; R4.1@-6970,-195 -6965,-195 C3.1@-6930,-230 ; C3.1@-6900,-270 -6875,-270 -6845,-300 -6845,-645 C9.2@-6885,-685 ; -6845,-355 R12.2@-6790,-355
U201-8: C2.2 R8.2 U201.8 | length 197.3
  Top Layer w7: R8.2@-7400,-600 -7315,-515 -7315,-510 -7320,-505 U201.8@-7320,-440
U202-10: C38.1 DD13.3 QA10.3 R82.1 U202.10 | length 1580.6
  Top Layer w7: C38.1@-5965,-870 -5930,-870 -5910,-850 ; U202.10@-5850,-850 -5910,-850 ; -5770,-1025 -5770,-950 -5795,-925 -5900,-925 -5910,-915 -5910,-850 ; -5770,-1020 -5770,-1070 -5815,-1115 -5815,-1420 -5775,-1460 -5510,-1460 -5480,-1430 QA10.3@-5480,-1380 ; QA10.3@-5480,-1355 -5465,-1340 -5465,-1275 -5420,-1230 DD13.3@-5400,-1230 ; -5390,-1215 -5390,-1105 -5365,-1080 R82.1@-5365,-1065
U202-11: C40.2 DD3.2 DD7.1 R90.2 R95.2 U202.11 | length 1735
  Top Layer w7: DD7.1@-6130,-685 -6135,-685 -6190,-630 -6190,-540 -6160,-510 -5980,-510 DD3.2@-5975,-515 ; DD3.2@-5990,-525 -5990,-625 -5960,-655 -5935,-655 -5895,-695 -5795,-695 ; U202.11@-5805,-905 -5785,-885 -5785,-720 -5790,-715 -5790,-705 ; -5645,-700 -5620,-700 -5570,-750 -5405,-750 -5360,-795 -5280,-795 -5270,-785 -5270,-740 -5310,-700 -5310,-605 -5320,-595 R95.2@-5340,-595
  Bottom Layer w7: -5795,-695 -5660,-695 -5650,-705
U203-1: C6.1 R18.1 R91.2 R107.1 U203.1 | length 3926.2
  Top Layer w7: R18.1@-7295,-935 -7240,-935 C6.1@-7235,-940 ; C6.1@-7235,-925 -7235,-885 U203.1@-7205,-855 ; C6.1@-7225,-950 -7225,-965 -7200,-990 -6970,-990 -6895,-1065 ; -6750,-1075 -6725,-1075 -6710,-1060 -6190,-1060 -6170,-1080 -5960,-1080 -5910,-1130 -5865,-1175 -5865,-1425 -5790,-1500 -5285,-1500 -5265,-1520 -5265,-1550 -5230,-1585 -4810,-1585 -4790,-1565 -4785,-1565 ; R107.1@-4945,-805 -4950,-810 -4950,-825 -4950,-995 -4920,-1025 -4920,-1200 -4885,-1235 R91.2@-4885,-1265 ; R91.2@-4890,-1280 -4870,-1280 -4835,-1315 -4835,-1405 -4867.5,-1437.5
  Bottom Layer w7: -6890,-1065 -6875,-1080 -6740,-1080 ; -4875,-1440 -4875,-1515 -4830,-1560 -4785,-1560
U203-3: C7.2 R13.1 U203.3 | length 348.1
  Top Layer w7: U203.3@-7135,-755 -7130,-755 -7105,-730 -7105,-645 C7.2@-7075,-615 ; C7.2@-7070,-595 -7070,-585 -7045,-560 R13.1@-6910,-560
U203-6: R9.1 R10.2 U203.6 | length 145.7
  Top Layer w7: R9.1@-7560,-695 -7495,-695 R10.2@-7490,-700 ; R10.2@-7445,-715 -7435,-715 U203.6@-7390,-760
U203-8: C10.1 R20.2 U203.8 | length 281.6
  Top Layer w7: C10.1@-7500,-1040 R20.2@-7445,-1040 ; R20.2@-7440,-1015 -7415,-990 -7360,-990 -7345,-975 U203.8@-7345,-860
U400-2: C29.2 R62.1 U400.2 U400.13 U401.4 U401.6 U401.8 | length 2359.1
  Top Layer w7: U400.2@-7320,-2550 -7320,-2300 -7260,-2240 -6660,-2240 ; -6500,-2275 -6475,-2300 -6190,-2300 -6185,-2295 -6185,-2190 -6215,-2160 -6215,-2145 -6150,-2080 C29.2@-6125,-2080 ; U401.4@-6390,-2575 -6390,-2610 -6375,-2625 -6295,-2625 ; U401.6@-6285,-2585 -6285,-2615 -6295,-2625 ; -6240,-2445 -6240,-2305 ; -6155,-2545 -6155,-2605 -6175,-2625 -6295,-2625
  Bottom Layer w7: -6655,-2235 -6565,-2235 -6525,-2275 -6510,-2275 ; -6240,-2450 -6150,-2540
U401-1: U400.8 U401.1 | length 767.5
  Top Layer w7: U400.8@-7070,-2370 -7070,-2325 -7040,-2295 -6685,-2295 -6615,-2365 -6615,-2475 -6540,-2550 U401.1@-6540,-2560
U401-2: U400.5 U401.2 U401.5 | length 1330.6
  Top Layer w7: -6855,-2540 -6855,-2635 -6795,-2695 -6685,-2695 -6625,-2755 -6510,-2755 -6500,-2745 -6500,-2640 -6495,-2635 -6495,-2615 ; U401.2@-6495,-2585 -6495,-2615 ; U401.5@-6340,-2525 -6340,-2520 -6360,-2500 -6395,-2500 -6415,-2520 -6415,-2610 -6425,-2620 -6490,-2620 -6495,-2615
  Top Layer w7.87: -7175,-2490 -7175,-2530 U400.5@-7165,-2540
  Bottom Layer w7: -7175,-2485 -6930,-2485 -6875,-2540 -6860,-2540